# EAGLE board gpi-filter2 (EAGLE 7.1.0)
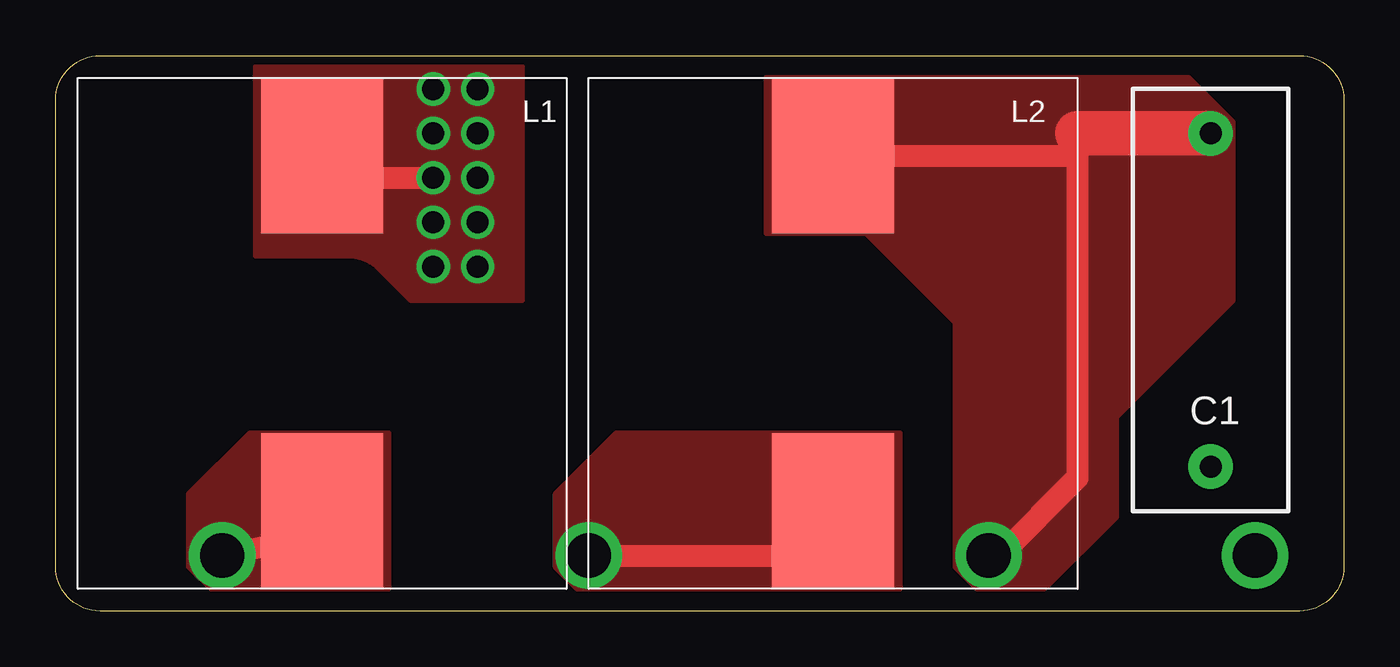
[diagram p0: board, top side]
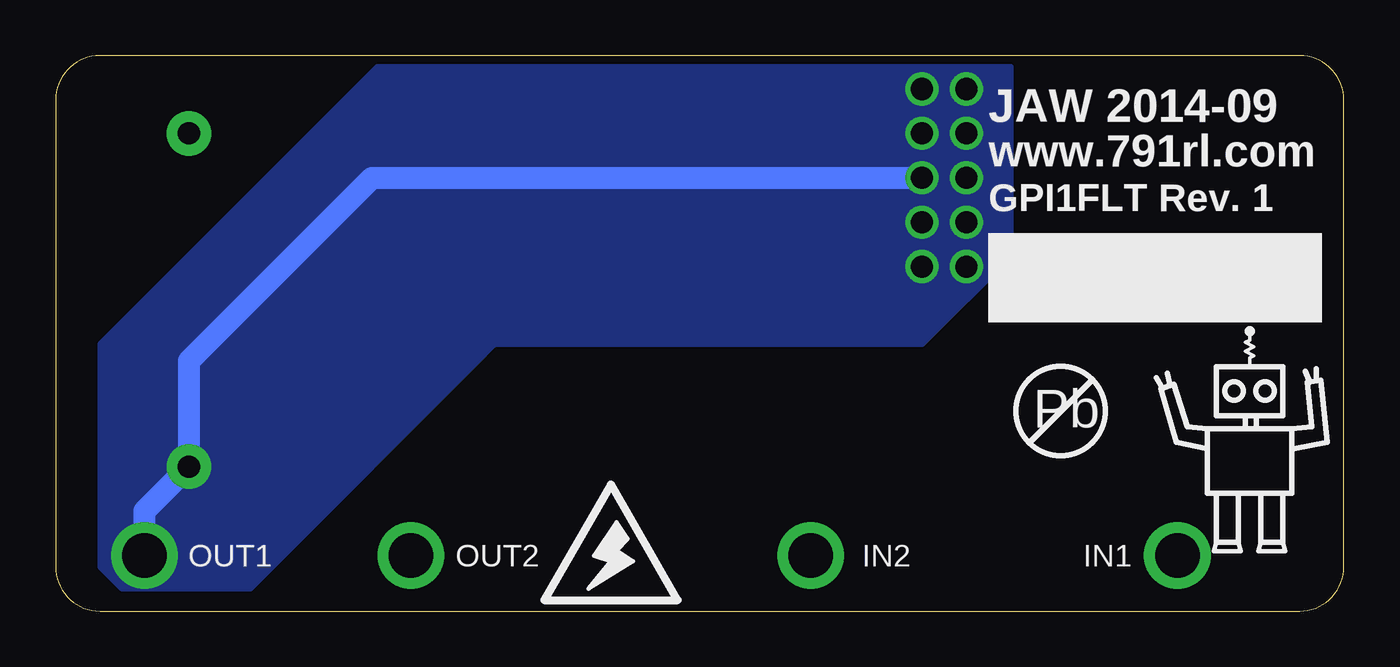
[diagram p1: board, bottom side, seen from below]

Size 58 x 25 mm. Coordinates in mm from the lower left corner, seen from the top.
Outline: 58,23 58,2 arc-90 56,0 2,0 arc-90 0,2 0,23 arc-90 2,25 56,25 arc-90 58,23
Copper layers (1*16): Top 0.0356mm / dielectric 1.5011mm / Bottom 0.0356mm
Design rules "LaenPCBOrder *": minimum track width 6mil, minimum drill 13mil, track to track 6mil, track to pad 6mil, pad to pad 6mil, via to via 6mil, smd to smd 6mil, copper to edge 15mil, drill to drill 6mil, minimum pad ring 7mil, minimum via ring 7mil, stop-mask expansion 4mil, vias tented up to drill 1.5mm, thermal gap 10mil

## Footprints (pad centres in the part's own frame; a part is rotated, then mirrored left to right if it is on the bottom)
R46KI333000N1M = drill 1 pad 2: P$1 -7.5,0; P$2 7.5,0
WEHCI = smd 5.5 x 7: P$1 0,8; P$2 0,-8

## Placement (x,y rotation side)
C1  .68u  [R46KI333000N1M]  52,14 90 top
L1  10u  [WEHCI]  12,12.5 180 top
L2  10u  [WEHCI]  35,12.5 180 top
U$1  ROBOTMAN-LOGO  [ROBOTMAN-LOGO]  4.25,7 0 bottom
U$2  SYMBOL-WARNING  [SYMBOL-WARNING]  33,2.5 0 bottom

## Library data of the parts
C1 L1 L2 U$1 U$2 = jaw

## Nets
IN1: L1.P$1
IN2: L2.P$1
OUT1: C1.P$1 L1.P$2
OUT2: C1.P$2 L2.P$2

## Tracks (layer width: path | path; a pad name or v marks a point on that pad's centre or on a via)
IN1  (via drill 2)
  Top 1: v7.5,2.5 12,3.5 L1.P$1
  pour Top (no thermals): 15,1 7,1 6,2 6,5.25 8.75,8 15,8
IN2  (via drill 2)
  Top 1: v24,2.5 32.75,2.5 L2.P$1
  pour Top (no thermals): 38,1 23.5,1 22.5,2 22.5,5.25 25.25,8 38,8
OUT1  (via drill 1, 2 pad 3)
  Top 1: L1.P$2 12,19.5 v17,19.5
  Bottom 1: v19,19.5 43.75,19.5 52,11.25 C1.P$1 54,4.5 v54,2.5
  other vias: 17,23.5 17,21.5 17,17.5 19,23.5 19,21.5 19,17.5 17,15.5 19,15.5
  pour Top (no thermals): 9,24.5 21,24.5 21,14 16,14 14.59,15.41 arc45 13.17,16 9,16
  pour Bottom (no thermals): 15,24.5 43.5,24.5 56,12 56,2 55,1 49.25,1 38.25,12 19,12 15,16
OUT2  (via drill 2 pad 3)
  Top 1: L2.P$2 46,20.5 | 46,20.5 46,21.5 46,20.5 | 46,20.5 46,6 42.5,2.5 v42,2.5
  Top 2: C1.P$2 46,21.5
  pour Top (no thermals): 32,17 36.5,17 40.5,13 40.5,2 41.5,1 44.5,1 47.75,4.25 47.75,8.75 53,14 53,22 51,24 32,24

## Text on the board
bPlace: JAW 2014-09 | www.791rl.com | GPI1FLT Rev. 1 | Pb | IN2 | OUT1 | IN1 | OUT2